# Altium PCB PCB1.PcbDoc
Units mm, origin at the board's own origin, x right, y up, seen from the top; angles counter-clockwise.
Board outline 109.51 x 68.75 mm, 2 copper layers (Top Layer, Bottom Layer); 66 components, 67 nets, 260 pads, 16 vias.
Unrouted connection lines stored in the file: 127.
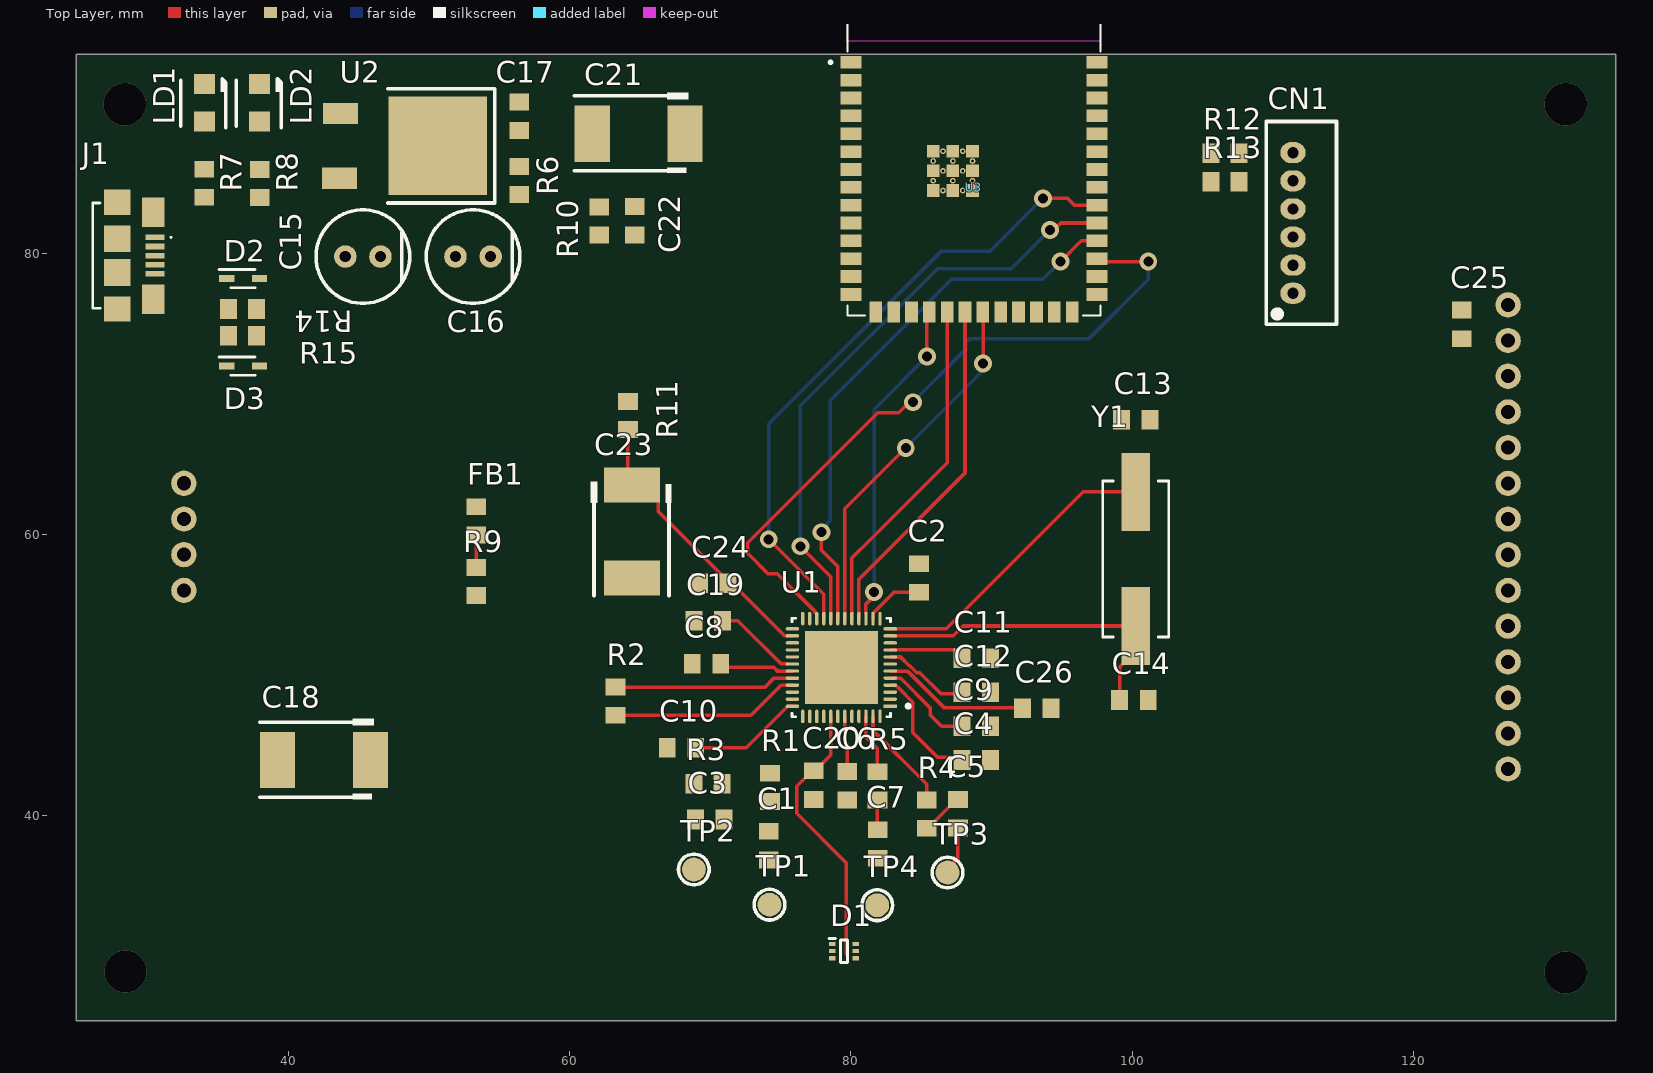
[diagram p0: Top Layer view]
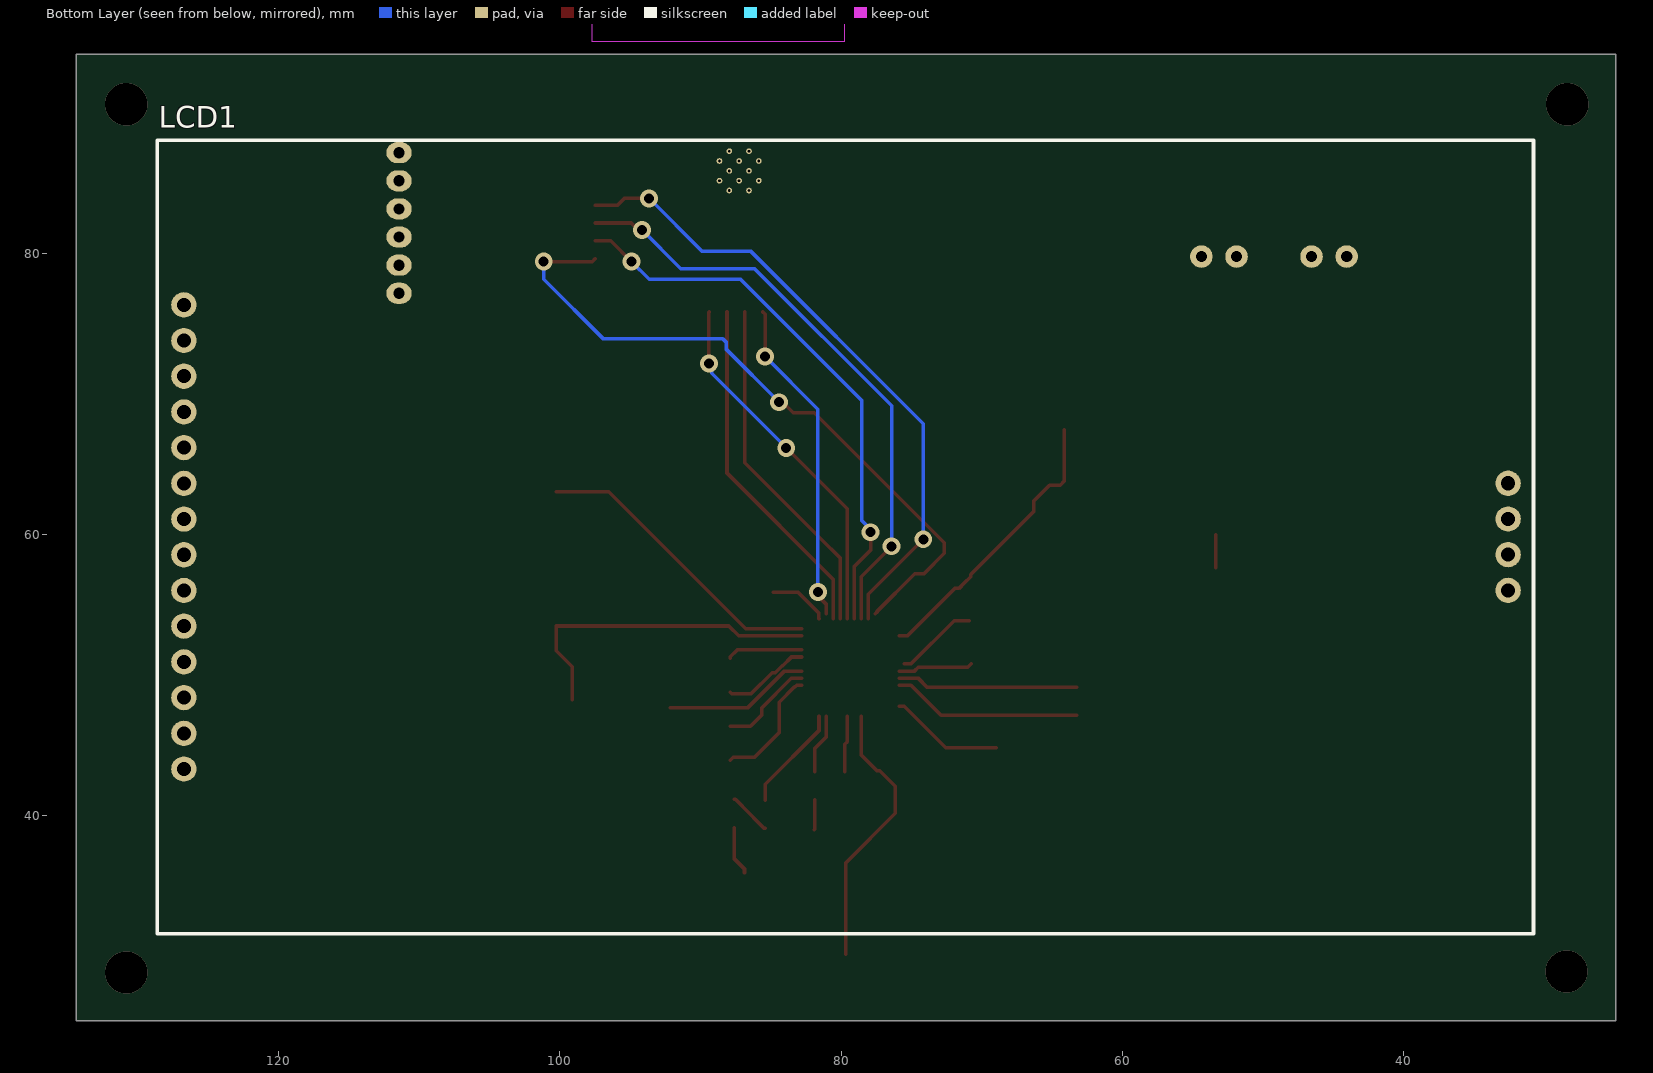
[diagram p1: Bottom Layer view, seen from below]

## Layer stack, top to bottom
Top Solder: solder mask 0.0102, Solder Resist, Dk 3.5
Top Layer: signal copper 0.0356
Dielectric 1: dielectric 0.32, FR-4, Dk 4.8
Bottom Layer: signal copper 0.0356
Bottom Solder: solder mask 0.0102, Solder Resist, Dk 3.5

## Board outline
24.892,25.4 134.4,25.4 134.4,94.15 24.892,94.15

## Design rules (kind name [scope] priority, off if disabled: settings)
Clearance [All] p1: gap=0.254 ignorepadtopadclearanceinfootprint=FALSE ismatrix=TRUE
PolygonConnect [All] p1: connectstyle=Relief reliefconductorwidth=0.254 reliefentries=4 polygonreliefangle="90 Angle" airgapwidth=0.254
RoutingVias [All] p1: holewidth=0.711 width=1.27 viastyle="Through Hole" minholewidth=0.711 minwidth=1.27 maxholewidth=0.711 maxwidth=1.27
SolderMaskExpansion [All] p1: expansion=0.102 istentingtop=FALSE
SupplyNets "Schematic Supply Nets_5" [InNet('GND')] p1: voltage=0.000
SupplyNets "Schematic Supply Nets_4" [InNet('AVDD_AD')] p2: voltage=0.000
SupplyNets "Schematic Supply Nets_3" [InNet('DVDD_AD')] p3: voltage=0.000
SupplyNets "Schematic Supply Nets_2" [InNet('+5')] p4: voltage=0.000
SupplyNets "Schematic Supply Nets_1" [InNet('+3.3')] p5: voltage=0.000
SupplyNets "Schematic Supply Nets" [InNet('DVDD')] p6: voltage=0.000
Width [All] p1: maxlimit=0.254 minlimit=0.254 preferedwidth=0.254
30 further rules are at their usual default settings.

## Classes and differential pairs
component class Microcontrolador: C25 CN1 D2 D3 J1 LCD1 R12 R13 R14 R15 U3
component class alimentacao: C15 C16 C17 C18 C19 C20 C21 C22 C23 C24 C26 FB1 FB? LD1 LD2 R6 R7 R8 R9 R10 R11 U2
component class ad5941: C1 C2 C3 C4 C5 C6 C7 C8 C9 C10 C11 C12 C13 C14 D1 R1 R2 R3 R4 R5 TP1 TP2 TP3 TP4 TP5 TP6 TP7 TP8 TP9 TP10 TP11 TP12 U1 Y1

## Components (designator, comment, footprint, x,y, rotation, side; value= is the part's Value field where it differs from the comment)
C1 "CAP SMD CER 10UF 50V 1206" CAP0805OK 74.149,37.862 r270 top value=10uF
C2 "CAP SMD CER 470NF 100V 0805" CAP0805OK 84.836,56.896 r270 top value=470nF
C3 "CAP SMD CER 10UF 50V 1206" CAP0805OK 69.965,39.719 r180 top value=10uF
C4 "CAP SMD CER 470NF 100V 0805" CAP0805OK 88.9,43.942 r180 top value=470nF
C5 "CAP SMD CER 10UF 50V 1206" CAP0805OK 87.61,40.134 r270 top value=10uF
C6 "CAP SMD CER 4.7UF 50V 0805" CAP0805OK 79.725,42.116 r90 top value=4.7uF
C7 "CAP SMD CER 10UF 50V 1206" CAP0805OK 81.915,37.973 r270 top value=10uF
C8 "CAP SMD CER 470NF 100V 0805" CAP0805OK 69.723,50.8 r0 top value=470nF
C9 "CAP SMD CER 470NF 100V 0805" CAP0805OK 88.9,46.355 r180 top value=470nF
C10 "CAP SMD CER 100NF 25V 0805" CAP0805OK 67.945,44.831 r180 top value=100nF
C11 "CAP SMD CER 1UF 10V 0805" CAP0805OK 88.9,51.181 r180 top value=1uF
C12 "CAP SMD CER 100NF 25V 0805" CAP0805OK 88.9,48.768 r0 top value=100nF
C13 "CAP SMD CER 6.8PF 25V 0805" CAP0805OK 100.255,68.159 r0 top value=6.8pF
C14 "CAP SMD CER 100NF 25V 0805" CAP0805OK 100.128,48.22 r0 top value=100nF
C15 "CAP PTH ELE 100UF 25V" CAPELETR11X6.3X2.5 44.034,79.757 r0 top value=100uF
C16 "CAP PTH ELE 100UF 25V" CAPELETR11X6.3X2.5 51.868,79.757 r0 top value=100uF
C17 "CAP SMD CER 100NF 25V 0805" CAP0805OK 56.405,89.745 r90 top value=100nF
C18 "CAP SMD TAN 10UF 25V 2312" CAP2312 42.513,43.853 r180 top value=10uF
C19 "CAP SMD CER 100NF 25V 0805" CAP0805OK 69.85,53.848 r180 top value=100nF
C20 "CAP SMD CER 100NF 25V 0805" CAP0805OK 77.343,42.164 r270 top value=100nF
C21 "CAP SMD TAN 10UF 25V 2312" CAP2312 64.897,88.392 r180 top value=10uF
C22 "CAP SMD CER 100NF 25V 0805" CAP0805OK 64.626,82.311 r270 top value=100nF
C23 "CAP SMD TAN 10UF 25V 2312" CAP2312 64.516,60.198 r270 top value=10uF
C24 "CAP SMD CER 100NF 25V 0805" CAP0805OK 70.231,56.515 r180 top value=100nF
C25 "CAP SMD CER 100NF 25V 0805" CAP0805OK 123.444,74.93 r90 top value=100nF
C26 "CAP SMD CER 100NF 25V 0805" CAP0805OK 93.218,47.625 r0 top value=100nF
CN1 "CN MAC 6 VIAS 180º 2.54MM" PHMC4-06 111.438,77.146 r90 top
D1 "SP3004-04XTG" SOTFL50P160X60-6N 79.502,30.353 r0 top
D2 "SD05C-7" SOD2513X120N 36.757,78.189 r0 top
D3 "SD05C-7" SOD2513X120N 36.757,71.966 r0 top
FB1 "FERRITE BEAD SMD 600R 0805" RES0805OK 53.34,60.96 r270 top value="FER BEAD 600R"
J1 "microUSB" MICROUSB 28.613,79.826 r270 top
LCD1 "Display 3,5\"" "DISPLAY_3.5\"_SPI_480X320" 30.646,88.007 r0 bottom locked
LD1 "PLCC-2" PLCC-2 34.001,90.688 r90 top
LD2 "PLCC-2" PLCC-2 37.938,90.688 r90 top
R1 "RES SMD 1K6 0.1% 0805" RES0805OK 74.245,42.005 r270 top value=1K
R2 "RES SMD 1K 1% 0805" RES0805OK 63.246,48.133 r90 top value=1K
R3 "RES SMD 1K6 0.1% 0805" RES0805OK 69.838,42.259 r180 top value=1K
R4 "RES SMD 10R 1% 0805" RES0805OK 85.381,40.096 r270 top value=10R
R5 "RES SMD 10R 1% 0805" RES0805OK 81.884,42.116 r270 top value=10R
R6 "RES SMD 0R 5% 0805" RES0805OK 56.405,85.173 r270 top value=0R
R7 "RES SMD 1K 1% 0805" RES0805OK 34.001,84.973 r270 top value=470
R8 "RES SMD 1K 1% 0805" RES0805OK 37.938,84.957 r270 top value=470
R9 "RES SMD 0R 5% 0805" RES0805OK 53.34,56.642 r270 top value=0R
R10 "RES SMD 0R 5% 0805" RES0805OK 62.086,82.295 r90 top value=0R
R11 "RES SMD 0R 5% 0805" RES0805OK 64.135,68.453 r270 top value=0R
R12 "" RES0805OK 106.612,87.115 r180 top value=10K
R13 "RES SMD 4K7 1% 0805" RES0805OK 106.612,85.083 r180 top value=10K
R14 "RES SMD 100K 1% 0805" RES0805OK 36.716,76.03 r0 top value=100K
R15 "RES SMD 100K 1% 0805" RES0805OK 36.716,74.125 r0 top value=100K
TP1 "U+" "TEST POINT" 74.206,33.657 r180 top
TP2 "U-" "TEST POINT" 68.822,36.163 r180 top
TP3 "I+" "TEST POINT" 86.868,35.941 r180 top
TP4 "I-" "TEST POINT" 81.866,33.62 r180 top
TP5 "RE0" "TEST POINT" 276.769,1.219 r0 top
TP6 "SE0" "TEST POINT" 270.927,1.219 r0 top
TP7 "AIN2" "TEST POINT" 265.085,1.219 r0 top
TP8 "AIN4" "TEST POINT" 259.116,1.219 r0 top
TP9 "AFE1" "TEST POINT" 253.274,1.219 r0 top
TP10 "AFE2" "TEST POINT" 247.432,1.219 r0 top
TP11 "AFE3" "TEST POINT" 239.028,1.449 r0 top
TP12 "AFE4" "TEST POINT" 243.092,1.576 r0 top
U1 "AD5941BCPZ" FP-CP-48-4-IPC_A 79.315,50.526 r180 top
U2 "LM1117" TO252-3 50.598,87.631 r270 top
U3 "IC SMD ESP32-S3-WROOM-1-N4R2" XCVR_ESP32-S3-WROOM-1-N4R2 88.746,88.315 r0 top
Y1 "XTAL SMD 16MHZ" "XTAL SMD 16MHZ" 100.255,58.253 r90 top

## Footprints (in the part's own frame and the unit in brackets; to place one, negate y for a bottom-side part, rotate by r counter-clockwise, add the part's x,y. Pads: shape width x height; smd on the part's side, far side on the other; paste and mask are expansions set on the pad)
CAP0805OK [mm]
  rect 1.2x1.4 smd: 1(-1.016,0) 2(1.016,0)
  body extent -1.4,-0.62 1.4,0.62, height 0.8
CAP2312 [mm]
  rect 2.5x4 smd: 1(-3.3,-0.1) 2(3.3,-0.1)
  silkscreen extent -3.56,-3.05 4.57,2.7, body extent -3.8,-2.3 3.8,2.3, height 3.1
CAPELETR11X6.3X2.5 [mm]
  round 1.6 hole 0.8: 1(0,0) 2(2.5,0)
  silkscreen extent -2.08,-3.33 4.58,3.33, body extent -1.89,-3.15 4.39,3.13, height 11.2
"DISPLAY_3.5\"_SPI_480X320" [mm]
  round 1.8 hole 1: 1(96.1,11.68) 2(96.1,14.22) 3(96.1,16.76) 4(96.1,19.3) 5(96.1,21.84) 6(96.1,24.38) 7(96.1,26.92) 8(96.1,29.46) 9(96.1,32) 10(96.1,34.54) 11(96.1,37.08) 12(96.1,39.62) 13(96.1,42.16) 14(96.1,44.7) 15(1.9,31.995) 16(1.9,29.455) 17(1.9,26.915) 18(1.9,24.375)
  silkscreen extent 0.1,-0.03 98,56.43, body extent 0,0 98,56.34, height 11.7
FP-CP-48-4-IPC_A [mm]
  rect 0.961x0.239 smd paste+0 mask+0: 1(-3.476,2.75)
  rrect100% 0.961x0.239 smd paste+0 mask+0: 2(-3.476,2.25) 3(-3.476,1.75) 4(-3.476,1.25) 5(-3.476,0.75) 6(-3.476,0.25) 7(-3.476,-0.25) 8(-3.476,-0.75) 9(-3.476,-1.25) 10(-3.476,-1.75) 11(-3.476,-2.25) 12(-3.476,-2.75) 25(3.476,-2.75) 26(3.476,-2.25) 27(3.476,-1.75) 28(3.476,-1.25) 29(3.476,-0.75) 30(3.476,-0.25) 31(3.476,0.25) 32(3.476,0.75) 33(3.476,1.25) 34(3.476,1.75) 35(3.476,2.25) 36(3.476,2.75)
  rrect100% 0.239x0.961 smd paste+0 mask+0: 13(-2.75,-3.476) 14(-2.25,-3.476) 15(-1.75,-3.476) 16(-1.25,-3.476) 17(-0.75,-3.476) 18(-0.25,-3.476) 19(0.25,-3.476) 20(0.75,-3.476) 21(1.25,-3.476) 22(1.75,-3.476) 23(2.25,-3.476) 24(2.75,-3.476) 37(2.75,3.476) 38(2.25,3.476) 39(1.75,3.476) 40(1.25,3.476) 41(0.75,3.476) 42(0.25,3.476) 43(-0.25,3.476) 44(-0.75,3.476) 45(-1.25,3.476) 46(-1.75,3.476) 47(-2.25,3.476) 48(-2.75,3.476)
  rect 5.2x5.2 smd paste-1000 mask+0: 49(0,0)
  silkscreen extent -4.88,-3.5 3.5,3.5, body extent -4.46,-4.46 4.46,4.46, height 0.25
MICROUSB [mm]
  rect 0.4x1.35 smd: 1(-1.3,1.875) 2(-0.65,1.875) 3(0,1.875) 4(0.65,1.875) 5(1.3,1.875)
  rect 2.1x1.6 smd: MP1(-3.1,1.75) MP2(3.1,1.75)
  rect 1.8x1.9 smd: MP3(-3.8,-0.8) MP6(3.8,-0.8)
  rect 1.9x1.9 smd: MP4(-1.2,-0.8) MP5(1.2,-0.8)
  silkscreen extent -3.75,-2.55 3.75,3.08, body extent -3.96,-2.55 3.96,2.55, height 2.77
PHMC4-06 [mm]
  oval 1.5x1.8 hole 0.8: 1(0,0) 2(2,0) 3(4,0) 4(6,0) 5(8,0) 6(10,0)
  silkscreen extent -2.21,-3.1 12.22,1.91, body extent -2,-2.93 12,1.72, height 6.02
PLCC-2 [mm]
  rect 1.4x1.5 smd: 1(-1.321,0) 2(1.346,0)
  silkscreen extent -1.78,-1.52 1.7,1.68, body extent -1.75,-1.43 1.75,1.53, height 1.75
RES0805OK [mm]
  rect 1.2x1.4 smd: 1(-1,0) 2(1,0)
  body extent -1,-0.62 1,0.63, height 0.78
SOD2513X120N [mm]
  rect 1.075x0.5 smd: 1(-1.162,0) 2(1.162,0)
  silkscreen extent -1.7,-0.65 0.85,0.65, body extent -1.25,-0.65 1.25,0.65, height 1.2
SOTFL50P160X60-6N [mm]
  rect 0.475x0.3 smd: 1(-0.838,0.5) 2(-0.838,0) 3(-0.838,-0.5) 4(0.838,-0.5) 5(0.838,0) 6(0.838,0.5)
  silkscreen extent -1.07,-0.8 0.25,0.9, body extent -0.8,-0.8 0.8,0.8, height 0.6
"TEST POINT" [mm]
  round 1.7 smd: 0(0,0)
  silkscreen extent -1.09,-1.09 1.09,1.09
TO252-3 [mm]
  rect 1.5x2.5 smd: 1(-2.3,-6.9) 3(2.3,-6.985)
  rect 7x7 smd: 2(0,0)
  silkscreen extent -4.06,-3.56 4.06,4.06, body extent -3.29,-7.81 3.29,2.1, height 2.29
XCVR_ESP32-S3-WROOM-1-N4R2 [mm]
  rect 1.5x0.9 smd: 1(-8.75,5.26) 2(-8.75,3.99) 3(-8.75,2.72) 4(-8.75,1.45) 5(-8.75,0.18) 6(-8.75,-1.09) 7(-8.75,-2.36) 8(-8.75,-3.63) 9(-8.75,-4.9) 10(-8.75,-6.17) 11(-8.75,-7.44) 12(-8.75,-8.71) 13(-8.75,-9.98) 14(-8.75,-11.25) 27(8.75,-11.25) 28(8.75,-9.98) 29(8.75,-8.71) 30(8.75,-7.44) 31(8.75,-6.17) 32(8.75,-4.9) 33(8.75,-3.63) 34(8.75,-2.36) 35(8.75,-1.09) 36(8.75,0.18) 37(8.75,1.45) 38(8.75,2.72) 39(8.75,3.99) 40(8.75,5.26)
  rect 0.9x1.5 smd: 15(-6.985,-12.5) 16(-5.715,-12.5) 17(-4.445,-12.5) 18(-3.175,-12.5) 19(-1.905,-12.5) 20(-0.635,-12.5) 21(0.635,-12.5) 22(1.905,-12.5) 23(3.175,-12.5) 24(4.445,-12.5) 25(5.715,-12.5) 26(6.985,-12.5)
  rect 0.9x0.9 smd: 41_1(-1.5,-2.46) 41_2(-2.9,-2.46) 41_3(-0.1,-2.46) 41_4(-2.9,-3.86) 41_5(-1.5,-3.86) 41_6(-0.1,-3.86) 41_7(-2.9,-1.06) 41_8(-1.5,-1.06) 41_9(-0.1,-1.06)
  round 0.4 hole 0.2 mask+0: 41_10(-1.5,-1.76) 41_11(-2.9,-1.76) 41_12(-0.1,-1.76) 41_13(-2.9,-3.16) 41_14(-1.5,-3.16) 41_15(-0.1,-3.16) 41_16(-2.2,-1.06) 41_17(-0.8,-1.06) 41_18(-2.2,-2.46) 41_19(-0.8,-2.46) 41_20(-2.2,-3.86) 41_21(-0.8,-3.86)
  Keep-Out Layer region: 9,6.75 -9,6.75 -9,12.75 9,12.75
  Keep-Out Layer region: 9,6.75 -9,6.75 -9,12.75 9,12.75
  silkscreen extent -10.3,-12.75 9,12.75, body extent -9,-12.75 9,12.75, height 3.25
"XTAL SMD 16MHZ" [mm]
  rect 5.55x2.05 smd: 1(-4.775,0) 2(4.775,0)
  silkscreen extent -5.55,-2.35 5.55,2.35, body extent -7.34,-2.35 7.34,2.35, height 4.6

## Part data
C1 C3 C5 C7: library part "CAP SMD CER 10UF 10V 0805", "Multilayer Ceramic Capacitors MLCC - SMD/SMT 10 uF 10 VDC 10% 0805 X7R", Tolerance=20%, Voltage=50V, COD. CRISTOFOLI=EMP.00322, List="CAP CER 10UF 50V X5R 1206/UMK316BBJ106ML-T/Generic", Type=CERAMIC
C2 C4 C8 C9: Tolerance=10%, Voltage=100V, COD. CRISTOFOLI=EMP.00245, List="CAP CER 0.47UF 100V 10% X7R 0805/GRM21BR72A474KA73L/Murata Electronics North America", Type=CERAMIC
C6: Tolerance=10%, Voltage=50V, COD. CRISTOFOLI=EMP.00333, List="CAP CER 4.7UF 50V X5R 0805/CL21A475KBQNNNE/Samsung", Type=CERAMIC
C10 C12 C14 C17 C19 C20 C22 C24 C25 C26: Tolerance=10%, Voltage=25V, COD. CRISTOFOLI=EMP.00094, List="CAP CER 0.1UF 25V 10% X7R 0805/CGJ4J2X7R1E104K125AA/TDK", Type=CERAMIC
C11: Tolerance=20%, Voltage=10V, COD. CRISTOFOLI=EMP.00209, List="CAP- SMD/SMT X7R 0805 10V 1uF 20%/LMK212BJ105MG-T/Taiyo Yuden", Type=CERAMIC
C13: library part "CAP SMD CER 100NF 25V 0805", Tolerance=10%, Voltage=25V, COD. CRISTOFOLI=EMP.00094, List="CAP CER 0.1UF 25V 10% X7R 0805/CGJ4J2X7R1E104K125AA/TDK", Type=CERAMIC
C15 C16 C18 C21 C23: Tolerance=20%, Voltage=25V
  C15 C16: COD. CRISTOFOLI=EMP.00025, List="CAP ALUM 100UF 25V 20% RADIAL - ECA-1EM101I", Type="ALUMINIUM ELETROLITHIC"
  C18 C21 C23: COD. CRISTOFOLI=EMP.00040, List="CAP TANT 10UF 25V 20% 2312 / 293D106X0025C2TE3 / Vishay", Type=TANTALUM
CN1: "gravação micro", Manufacturer=METALTEX, Manufacturer Part Number=PHMC4-06, COD. CRISTOFOLI=EMP.00436, List="Barra de pinos Macho 180° / BPSC-03 / metaltex"
D1: "TVS Diode (Uni-directional)", Manufacturer_Name=LITTELFUSE, Mouser Part Number=576-SP3004-04XTG, Arrow Part Number=SP3004-04XTG, Arrow Price/Stock=https://www.arrow.com/en/products/sp3004-04xtg/littelfuse?region=nac, Datasheet Link=https://m.littelfuse.com/~/media/electronics/datasheets/tvs_diode_arrays/littelfuse_tvs_diode_array_sp3004_datasheet.pdf.pdf, Height=0.6mm, Manufacturer_Part_Number=SP3004-04XTG, Mouser Price/Stock=https://www.mouser.co.uk/ProductDetail/Littelfuse/SP3004-04XTG?qs=trbuaetfxXQ7JjseAkJ3Ww%3D%3D
D2 D3: "TVS Diode (Bi-directional)", Manufacturer_Name="Diodes Incorporated", Mouser Part Number=621-SD05C-7, Arrow Part Number=SD05C-7, Arrow Price/Stock=https://www.arrow.com/en/products/sd05c-7/diodes-incorporated?utm_currency=USD&region=nac, Datasheet Link=https://www.diodes.com//assets/Datasheets/SD05C.pdf, Height=1.2mm, Manufacturer_Part_Number=SD05C-7, Mouser Price/Stock=https://www.mouser.co.uk/ProductDetail/Diodes-Incorporated/SD05C-7?qs=lQAVKuKFhkJ%252Bbajm903DcQ%3D%3D
J1: "Connector", Arrow Part Number=10118192-0002LF, Manufacturer_Name="Amphenol Communications Solutions", Arrow Price/Stock=https://www.arrow.com/en/products/10118192-0002lf/amphenol-fci?utm_currency=USD&region=nac, Datasheet Link=https://cdn.amphenol-cs.com/media/wysiwyg/files/drawing/10118192.pdf, Height=3.08mm, Manufacturer_Part_Number=10118192-0002LF
LCD1: library part "Display 3,5\" SPI", "Display TFT SPI 480X320", COD. CRISTOFOLI=EMP.00435, Datasheet=http://www.lcdwiki.com/res/MSP3520/3.5inch_SPI_Module_MSP3520_User_Manual_EN.pdf, Documentações=http://www.lcdwiki.com/3.5inch_SPI_Module_ILI9488_SKU:MSP3520, List="Display TFT 3.5\" SPI 480X320 MSP3520"
LD1 LD2: library part "LED branco /67-21S/KK5C-H6565N32P02833Z6/2T(EMM)/Everlight", COD. CRISTOFOLI=EMP.00388, List="LED branco /67-21S/KK5C-H6565N32P02833Z6/2T(EMM)/Everlight"
R1 R2 R3: Tolerance=0.1%
  R1 R3: COD. CRISTOFOLI=EMP.00204, List="RES 1.6K OHM 1/8W .1% 0805 SMD/ERA-6AEB162V/Panasonic Electronic Components/Generic"
  R2: COD. CRISTOFOLI=EMP.50098, List="RES SMD 1K 1% 0805"
R4 R5 R7 R8: Tolerance=1%
  R4 R5: COD. CRISTOFOLI=EMP.50001, List="RES SMD 10R 1% 0805"
  R7 R8: COD. CRISTOFOLI=EMP.50098, List="RES SMD 1K 1% 0805"
R6 R9 R10 R11: Tolerance=5%, COD. CRISTOFOLI=EMP.00109, List="RES 0.0 OHM 1/8W JUMP 0805 SMD/ERJ-6GEY0R00V/Panasonic Electronic Components"
R12 R13 R14 R15: library part "RES SMD 10K 1% 0805", Tolerance=1%, COD. CRISTOFOLI=EMP.50116, List="RES SMD 10K 1% 0805"
TP1 TP2 TP3 TP4 TP5 TP6 TP7 TP8 TP9 TP10 TP11 TP12: library part "TEST POINT"
U1: library part CMP-09085-000021-2, "BIO-IMPEDANCE & ELECTROCHEMICAL", RoHS Compliant=Yes
U2: library part "IC SMD REG LM1117 TO252", "800mA Low-Dropout Linear Regulator", Manufacturer="Texas Instruments", Voltage="1.8 A 5V", COD. CRISTOFOLI=EMP.50030, List="IC SMD REG LM1117 TO252"
U3: "Bluetooth, WiFi 802.11b/g/n, Bluetooth v5.0 Transceiver Module 2.4GHz PCB Trace Surface Mount", Package=None, Availability="In Stock", Check_prices=https://www.snapeda.com/parts/ESP32-S3-WROOM-1-N4R2/Espressif+Systems/view-part/?ref=eda, COD. CRISTOFOLI=EMP.50161, List="IC SMD ESP32-S3-WROOM-1-N4R2", MF="Espressif Systems", MP=ESP32-S3-WROOM-1-N4R2, Price=None, Purchase-URL=https://pricing.snapeda.com/search/part/ESP32-S3-WROOM-1-N4R2/?ref=eda, SnapEDA_Link=https://www.snapeda.com/parts/ESP32-S3-WROOM-1-N4R2/Espressif+Systems/view-part/?ref=snap
Y1: "Crystal or Oscillator", Arrow Part Number=XT9M20ANA16M, Manufacturer_Name=Vishay, Mouser Part Number=73-XT49M1600-20, Arrow Price/Stock=https://www.arrow.com/en/products/xt9m20ana16m/vishay?region=nac, Datasheet Link=https://componentsearchengine.com/Datasheets/5/XT9M20ANA16M.pdf, Height=4.5mm, Manufacturer_Part_Number=XT9M20ANA16M, Mouser Price/Stock=https://www.mouser.co.uk/ProductDetail/Vishay-Dale/XT9M20ANA16M?qs=NVJATC80C4%252B3oEpMmPFr7g%3D%3D
FB1: COD. CRISTOFOLI=EMP.00336, List="FERRITE BEAD 600 OHM 0805/HZ0805E601R-10/Laird"

## Via types
v1: diameter 1.27, hole 0.711, Top Layer to Bottom Layer, 12 vias
v2: diameter 3, hole 3, Top Layer to Bottom Layer, 4 vias

## Nets (pads, with @x,y where several pads share a name; then routed paths per layer and width w, separated by ;. In a path a pad name is that pad's centre, name@x,y a point inside that pad or via, vN(x,y) a via of type N, cw(c..) or ccw(c..) an arc to the next point about the centre after c; other vN are vias at no path point)
+3.3: FB1.1 R6.2 R8.2 R10.1 R11.1
+5: C15.1 J1.1 R7.2 U2.3
AVDD_AD: C18.1 C19.1 C20.1 D1.5 R9.2 U1.30 U1.41 | length 25.4
  Top Layer w0.254: C19.1 71.952,53.848 75.017,50.783 U1.30@75.486,50.783 ; U1.41 78.565,44.302 77.443,43.18 C20.1 77.243,43.18 76.15,42.087 76.15,40.15 79.65,36.65 79.65,30.15
DVDD: C21.1 C22.1 C25.2 CN1.1 LCD1.1 LCD1.8 R10.2 R12.2 R13.2 U3.2
DVDD_AD: C23.1 C24.1 C26.1 R11.2 U1.6 U1.26 | length 30.9
  Top Layer w0.254: R11.2 64.135,63.779 C23.1 65.166,63.498 66.289,62.375 66.289,61.625 70.774,57.14 70.774,56.988 C24.1 71.612,56.15 71.9,56.15 75.267,52.783 75.832,52.783 U1.26 ; U1.6 84.024,50.276 86.65,47.65 C26.1@92.15,47.65
GND: C2.1 C4.1 C6.1 C8.1 C9.1 C10.2 C11.1 C12.2 C13.2 C14.2 C15.2 C16.2 C17.2 C18.2 C19.2 C20.2 C21.2 C22.2 C23.2 C24.2 C25.1 C26.2 CN1.2 D1.2 D2.1 D3.1 J1.5 J1.MP1 J1.MP2 J1.MP3 J1.MP4 J1.MP5 J1.MP6 LCD1.2 LD1.2 LD2.2 U1.13 U1.23 U1.25 U1.29 U1.42 U1.44 U1.49 U2.1 U3.1 U3.40 U3.41_1 U3.41_2 U3.41_3 U3.41_4 U3.41_5 U3.41_6 U3.41_7 U3.41_8 U3.41_9
NetC1_1: C1.1 R1.2
NetC1_2: C1.2 D1.1 TP1.0
NetC2_2: C2.2 U1.14 | length 4.3
  Top Layer w0.254: U1.14 81.572,54.009 81.572,54.395 83.057,55.88 C2.2
NetC3_1: C3.1 R3.2
NetC3_2: C3.2 D1.3 TP2.0
NetC4_2: C4.2 U1.4 | length 8.6
  Top Layer w0.254: U1.4 83.137,49.276 83.265,49.148 83.305,49.148 84.4,48.053 84.4,45.9 86.15,44.15 87.676,44.15 C4.2
NetC5_1: C5.1 R4.2 | length 3.1
  Top Layer w0.254: R4.2 85.481,39.096 87.037,40.652 87.037,40.677 87.51,41.15 C5.1
NetC5_2: C5.2 D1.4 TP3.0 | length 3.5
  Top Layer w0.254: TP3.0 86.868,36.198 87.61,36.94 C5.2
NetC6_2: C6.2 U1.43 | length 4
  Top Layer w0.254: U1.43 79.565,45.235 79.725,45.075 C6.2
NetC7_1: C7.1 R5.2 | length 2.1
  Top Layer w0.254: R5.2 81.884,39.02 C7.1
NetC7_2: C7.2 D1.6 TP4.0
NetC8_2: C8.2 U1.31 | length 5.3
  Top Layer w0.254: C8.2 70.993,50.546 74.504,50.546 74.774,50.276 U1.31
NetC9_2: C9.2 U1.5 | length 6.8
  Top Layer w0.254: U1.5 82.798,49.769 83.531,49.769 85.65,47.65 85.65,47.15 86.445,46.355 C9.2
NetC10_1: C10.1 U1.36 | length 8.1
  Top Layer w0.254: C10.1 72.548,44.831 75.493,47.776 U1.36
NetC11_2: C11.2 U1.9 | length 5.4
  Top Layer w0.254: U1.9 87.389,51.776 87.884,51.281 C11.2
NetC12_1: C12.1 U1.8 | length 6.2
  Top Layer w0.254: U1.8 83.524,51.276 84.145,50.655 84.181,50.655 84.686,50.15 84.9,50.15 86.4,48.65 87.766,48.65 C12.1
NetC13_1: C13.1 U1.12 Y1.2 | length 21.5
  Top Layer w0.254: U1.12 86.776,53.276 96.528,63.028 Y1.2
NetC14_1: C14.1 U1.11 Y1.1 | length 23.5
  Top Layer w0.254: U1.11 87.276,52.776 87.978,53.478 Y1.1 100.255,51.728 99.112,50.585 C14.1
NetC16_1: C16.1 C17.1 R6.1 U2.2
NetCN1_3: CN1.3 U3.37
NetCN1_4: CN1.4 U3.36
NetCN1_5: CN1.5 R13.1 U3.27
NetCN1_6: CN1.6 R12.1 U3.3
NetD2_2: D2.2 J1.2 R14.1
NetD3_2: D3.2 J1.3 R15.1
NetFB1_2: FB1.2 R9.1 | length 2.3
  Top Layer w0.254: R9.1 FB1.2
NetLCD1_3: LCD1.3 U3.39
NetLCD1_4: LCD1.4 U3.38
NetLCD1_5: LCD1.5 U3.15
NetLCD1_6: LCD1.6 LCD1.12 LCD1.17 U3.4
NetLCD1_7: LCD1.7 LCD1.10 LCD1.15 U3.5
NetLCD1_9: LCD1.9 LCD1.13 LCD1.16 U3.6
NetLCD1_11: LCD1.11 U3.7
NetLCD1_14: LCD1.14 U3.12
NetLCD1_18: LCD1.18 U3.17
NetLD1_1: LD1.1 R7.1
NetLD2_1: LD2.1 R8.1
NetR1_1: R1.1 U1.39
NetR2_1: R2.1 U1.33 | length 13.5
  Top Layer w0.254: R2.1 72.883,47.133 75.026,49.276 U1.33
NetR2_2: R2.2 U1.32 | length 12.9
  Top Layer w0.254: R2.2 73.883,49.133 74.526,49.776 U1.32
NetR3_1: R3.1 U1.38
NetR4_1: R4.1 U1.47 | length 7.5
  Top Layer w0.254: U1.47 81.565,46.045 85.381,42.229 R4.1
NetR5_1: R5.1 U1.46 | length 4.3
  Top Layer w0.254: U1.46 81.065,45.556 81.884,44.737 R5.1
NetR14_2: R14.2 U3.14
NetR15_2: R15.2 U3.23
NetTP5_0: TP5.0 U1.48
NetTP6_0: TP6.0 U1.45
NetTP7_0: TP7.0 U1.37
NetTP8_0: TP8.0 U1.40
NetTP9_0: TP9.0 U1.34
NetTP10_0: TP10.0 U1.35
NetTP11_0: TP11.0 U1.27
NetTP12_0: TP12.0 U1.28
NetU1_15: U1.15 U3.18 | length 23.3
  Top Layer w0.254: U1.15@81.065,54.355 81.065,55.048 81.65,55.633 v1(81.65,55.9) ; v1(85.4,72.65) 85.4,75.644 U3.18
  Bottom Layer w0.254: v1(81.65,55.9) 81.65,68.9 v1(85.4,72.65)
NetU1_16: U1.16 U3.20 | length 24.9
  Top Layer w0.254: U1.16 80.565,56.815 88.111,64.361 U3.20
NetU1_17: U1.17 U3.19 | length 24.6
  Top Layer w0.254: U1.17 80.065,58.315 81.4,59.65 86.841,65.091 U3.19
NetU1_18: U1.18 U3.21 | length 25.9
  Top Layer w0.254: U1.18 79.565,61.815 v1(83.9,66.15) ; U3.21 89.4,75.796 v1(89.4,72.15)
  Bottom Layer w0.254: v1(83.9,66.15) 89.206,71.456 89.206,71.956 v1(89.4,72.15)
NetU1_19: U1.19 U3.30 | length 39.9
  Top Layer w0.254: v1(77.9,60.15) 77.9,58.875 79.065,57.71 U1.19 ; v1(94.9,79.4) 96.375,80.875 U3.30
  Bottom Layer w0.254: v1(77.9,60.15) 77.9,60.361 78.513,60.974 78.513,69.513 87.15,78.15 93.65,78.15 v1(94.9,79.4)
NetU1_20: U1.20 U3.31 | length 42.5
  Top Layer w0.254: v1(76.4,59.15) 78.565,56.985 U1.20 ; v1(94.15,81.65) 94.425,81.65 94.92,82.145 U3.31
  Bottom Layer w0.254: v1(76.4,59.15) 76.4,69.15 86.15,78.9 91.4,78.9 v1(94.15,81.65)
NetU1_21: U1.21 U3.32 | length 45.7
  Top Layer w0.254: v1(74.15,59.65) 78.065,55.735 U1.21 ; v1(93.65,83.9) 95.4,83.9 95.9,83.4 97.481,83.4 U3.32
  Bottom Layer w0.254: v1(74.15,59.65) 74.15,67.864 86.436,80.15 89.9,80.15 v1(93.65,83.9)
NetU1_22: U1.22 U3.29 | length 49
  Top Layer w0.254: U1.22@77.558,54.355 77.437,54.476 77.437,54.516 74.747,57.206 74.094,57.206 72.65,58.65 72.65,59.404 81.896,68.65 83.4,68.65 84.15,69.4 v1(84.4,69.4) ; U3.29 97.701,79.4 v1(101.15,79.4)
  Bottom Layer w0.254: v1(84.4,69.4) 88.15,73.15 88.15,73.65 88.4,73.9 96.9,73.9 101.15,78.15 v1(101.15,79.4)
pads on no net: J1.4 U1.1 U1.2 U1.3 U1.7 U1.10 U1.24 U3.8 U3.9 U3.10 U3.11 U3.13 U3.16 U3.22 U3.24 U3.25 U3.26 U3.28 U3.33 U3.34 U3.35 U3.41_10 U3.41_11 U3.41_12 U3.41_13 U3.41_14 U3.41_15 U3.41_16 U3.41_17 U3.41_18 U3.41_19 U3.41_20 U3.41_21
copper on no net:
  other v2: 130.848,28.844 28.4,28.9 28.348,90.594 130.848,90.594

## Text inside footprints (layer, text, board x,y; h text height)
U3: Mechanical 13 "ANTENNA" at 84.246,97.815 h1.27